# Altium PCB PCB1.PcbDoc (part 3 of 8)
Units mil, origin at the board's own origin, x right, y up, seen from the top; angles counter-clockwise.
Board outline 3820 x 2600 mil, 2 copper layers (Top Layer, Bottom Layer); 88 components, 130 nets, 566 pads, 113 vias.
Unrouted connection lines stored in the file: 16.
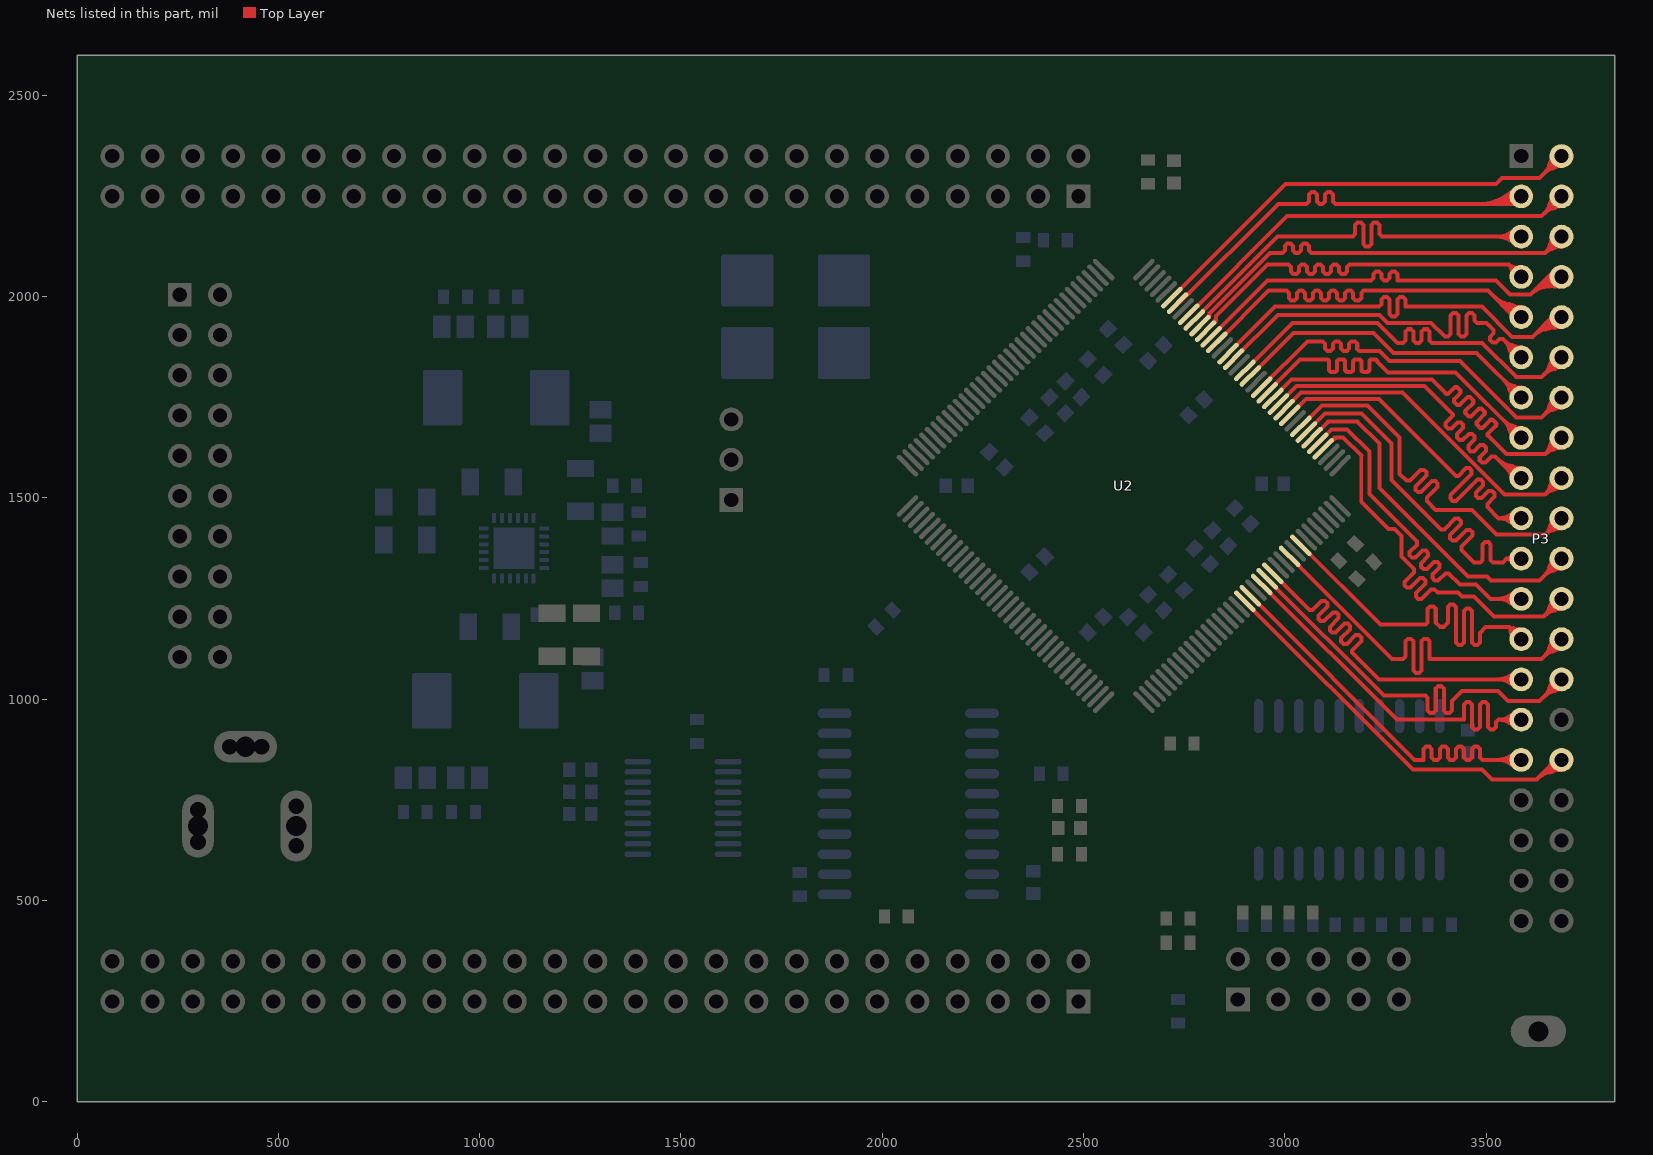
[diagram p3: the nets of this part, all layers, seen from the top]

## Via types
v1: diameter 30, hole 20, Top Layer to Bottom Layer, 74 vias
v2: diameter 20, hole 12, Top Layer to Bottom Layer, 36 vias
v3: diameter 17.72, hole 11.81, Top Layer to Bottom Layer, 3 vias

## Nets (pads, with @x,y where several pads share a name; then routed paths per layer and width w, separated by ;. In a path a pad name is that pad's centre, name@x,y a point inside that pad or via, vN(x,y) a via of type N, cw(c..) or ccw(c..) an arc to the next point about the centre after c; other vN are vias at no path point) (continued)
ADC1_D0: P3.3 U2.30 | length 2229.5
  Top Layer w10: U2.30@2733.63,1983.77 2737.56,1983.77 2983.78,2230 3054,2230 3060,2236 3060,2254.28 3066,2260.28 3074,2260.28 3080,2254.28 3080,2236 3086,2230 3094,2230 3100,2236 3100,2254.28 3106,2260.28 3114,2260.28 3120,2254.28 3120,2236 3126,2230 3568.19,2230 P3.3@3587.4,2249.21 ; U2.30@2754.51,2005.56 ccw(c2754.51,2017.24) 2762.76,2008.98 ; U2.30@2754.51,2005.56 ccw(c2754.51,2017.24) 2762.76,2008.98 ; U2.30@2754.51,2005.56 ccw(c2754.51,2017.24) 2762.76,2008.98 ; 3481.81,2230 ccw(c3481.81,2354.81) P3.3@3570.06,2266.56 ; 3481.81,2230 ccw(c3481.81,2354.81) P3.3@3570.06,2266.56 ; 3481.81,2230 ccw(c3481.81,2354.81) P3.3@3570.06,2266.56 ; 3505.95,2230 ccw(c3505.95,2330.67) P3.3@3577.13,2259.48 ; 3505.95,2230 ccw(c3505.95,2330.67) P3.3@3577.13,2259.48 ; 3505.95,2230 ccw(c3505.95,2330.67) P3.3@3577.13,2259.48 ; 3530.09,2230 ccw(c3530.09,2306.52) P3.3@3584.2,2252.41 ; 3530.09,2230 ccw(c3530.09,2306.52) P3.3@3584.2,2252.41 ; 3530.09,2230 ccw(c3530.09,2306.52) P3.3@3584.2,2252.41 ; 3539.02,2237.48 cw(c3551.19,2216.41) P3.3@3569.22,2232.74 ; 3539.02,2237.48 cw(c3551.19,2216.41) P3.3@3569.22,2232.74 ; 3539.02,2237.48 cw(c3551.19,2216.41) P3.3@3569.22,2232.74 ; 3549.75,2243.68 cw(c3560.58,2224.91) P3.3@3576.64,2239.46 ; 3549.75,2243.68 cw(c3560.58,2224.91) P3.3@3576.64,2239.46 ; 3549.75,2243.68 cw(c3560.58,2224.91) P3.3@3576.64,2239.46 ; 3552.08,2233.87 cw(c3559.71,2220.67) P3.3@3570.32,2231.61 ; 3552.08,2233.87 ccw(c3541.15,2252.8) P3.3@3562.95,2251.11 ; 3552.08,2233.87 cw(c3559.71,2220.67) P3.3@3570.32,2231.61 ; 3552.08,2233.87 ccw(c3541.15,2252.8) P3.3@3562.95,2251.11 ; 3552.08,2233.87 cw(c3559.71,2220.67) P3.3@3570.32,2231.61 ; 3552.08,2233.87 ccw(c3541.15,2252.8) P3.3@3562.95,2251.11 ; 3554.23,2230 ccw(c3554.23,2282.38) P3.3@3591.27,2245.34 ; 3554.23,2230 ccw(c3554.23,2282.38) P3.3@3591.27,2245.34 ; 3554.23,2230 ccw(c3554.23,2282.38) P3.3@3591.27,2245.34
ADC1_D1: P3.4 U2.28 | length 1747
  Top Layer w10: U2.28@2761.47,1955.93 3005.53,2200 3638.19,2200 P3.4@3687.4,2249.21 ; 3645.53,2207.34 cw(c3687.4,2165.47) P3.4@3687.4,2224.68 ; 3645.53,2207.34 ccw(c3603.66,2249.21) P3.4@3662.87,2249.21 ; 3645.53,2207.34 cw(c3687.4,2165.47) P3.4@3687.4,2224.68 ; 3645.53,2207.34 ccw(c3603.66,2249.21) P3.4@3662.87,2249.21 ; 3645.53,2207.34 ccw(c3603.66,2249.21) P3.4@3662.87,2249.21 ; 3645.53,2207.34 cw(c3687.4,2165.47) P3.4@3687.4,2224.68 ; 3656.89,2226.86 cw(c3694.02,2216.92) P3.4@3686.3,2254.57 ; 3656.89,2226.86 cw(c3694.02,2216.92) P3.4@3686.3,2254.57 ; 3656.89,2226.86 cw(c3694.02,2216.92) P3.4@3686.3,2254.57 ; 3662.6,2224.41 cw(c3687.4,2199.61) P3.4@3687.4,2234.68 ; 3662.6,2224.41 ccw(c3637.8,2249.21) P3.4@3672.87,2249.21 ; 3662.6,2224.41 cw(c3687.4,2199.61) P3.4@3687.4,2234.68 ; 3662.6,2224.41 ccw(c3637.8,2249.21) P3.4@3672.87,2249.21 ; 3662.6,2224.41 ccw(c3637.8,2249.21) P3.4@3672.87,2249.21 ; 3662.6,2224.41 cw(c3687.4,2199.61) P3.4@3687.4,2234.68 ; 3665.05,2218.7 ccw(c3655.11,2255.83) P3.4@3692.76,2248.11 ; 3665.05,2218.7 ccw(c3655.11,2255.83) P3.4@3692.76,2248.11 ; 3665.05,2218.7 ccw(c3655.11,2255.83) P3.4@3692.76,2248.11
ADC1_D2: P3.5 U2.27 | length 1501.1
  Top Layer w10: U2.27@2775.38,1942.01 2775.38,1943.27 2981.33,2149.21 3169,2149.21 3175,2155.21 3175,2177.68 3181,2183.68 3189,2183.68 3195,2177.68 3195,2131 3201,2125 3209,2125 3215,2131 3215,2177.68 3221,2183.68 3229,2183.68 3235,2177.68 3235,2155.21 3241,2149.21 P3.5@3587.4,2149.21 ; 3528.19,2149.21 cw(c3528.19,2090) P3.5@3570.06,2131.87 ; 3528.19,2149.21 ccw(c3528.19,2208.43) P3.5@3570.06,2166.56 ; 3528.19,2149.21 cw(c3528.19,2090) P3.5@3570.06,2131.87 ; 3528.19,2149.21 ccw(c3528.19,2208.43) P3.5@3570.06,2166.56 ; 3528.19,2149.21 ccw(c3528.19,2208.43) P3.5@3570.06,2166.56 ; 3528.19,2149.21 cw(c3528.19,2090) P3.5@3570.06,2131.87 ; 3552.33,2149.21 cw(c3552.33,2114.14) P3.5@3577.13,2138.94 ; 3552.33,2149.21 ccw(c3552.33,2184.28) P3.5@3577.13,2159.48 ; 3552.33,2149.21 cw(c3552.33,2114.14) P3.5@3577.13,2138.94 ; 3552.33,2149.21 ccw(c3552.33,2184.28) P3.5@3577.13,2159.48 ; 3552.33,2149.21 ccw(c3552.33,2184.28) P3.5@3577.13,2159.48 ; 3552.33,2149.21 cw(c3552.33,2114.14) P3.5@3577.13,2138.94
ADC1_D3: P3.6 U2.26 | length 1809.3
  Top Layer w10: U2.26@2789.3,1928.1 2813.17,1951.96 2813.17,1958.42 2963.43,2108.68 2994,2108.68 3000,2114.68 3000,2125.53 3006,2131.53 3014,2131.53 3020,2125.53 3020,2114.68 3026,2108.68 3034,2108.68 3040,2114.68 3040,2125.53 3046,2131.53 3054,2131.53 3060,2125.53 3060,2114.68 3066,2108.68 3646.87,2108.68 P3.6@3687.4,2149.21 ; U2.26@2809.54,1949.62 ccw(c2800.79,1958.37) 2813.17,1958.37 ; U2.26@2809.54,1949.62 ccw(c2800.79,1958.37) 2813.17,1958.37 ; U2.26@2809.54,1949.62 ccw(c2800.79,1958.37) 2813.17,1958.37 ; U2.26@2811.09,1948.98 cw(c2828.88,1948.98) 2816.3,1961.55 ; U2.26@2811.09,1948.98 cw(c2828.88,1948.98) 2816.3,1961.55 ; U2.26@2811.09,1948.98 cw(c2828.88,1948.98) 2816.3,1961.55 ; 3646.88,2108.69 cw(c3685.55,2070.01) P3.6@3686.83,2124.69 ; 3646.88,2108.69 ccw(c3608.2,2147.36) P3.6@3662.88,2148.64 ; 3646.88,2108.69 cw(c3685.55,2070.01) P3.6@3686.83,2124.69 ; 3646.88,2108.69 ccw(c3608.2,2147.36) P3.6@3662.88,2148.64 ; 3646.88,2108.69 ccw(c3608.2,2147.36) P3.6@3662.88,2148.64 ; 3646.88,2108.69 cw(c3685.55,2070.01) P3.6@3686.83,2124.69 ; 3657.2,2125.25 cw(c3696.05,2115.8) P3.6@3686.03,2154.51 ; 3657.2,2125.25 cw(c3696.05,2115.8) P3.6@3686.03,2154.51 ; 3657.2,2125.25 cw(c3696.05,2115.8) P3.6@3686.03,2154.51 ; 3663.4,2125.21 cw(c3686.31,2102.3) P3.6@3687.06,2134.69 ; 3663.4,2125.21 ccw(c3640.49,2148.12) P3.6@3672.88,2148.87 ; 3663.4,2125.21 cw(c3686.31,2102.3) P3.6@3687.06,2134.69 ; 3663.4,2125.21 ccw(c3640.49,2148.12) P3.6@3672.88,2148.87 ; 3663.4,2125.21 ccw(c3640.49,2148.12) P3.6@3672.88,2148.87 ; 3663.4,2125.21 cw(c3686.31,2102.3) P3.6@3687.06,2134.69 ; 3663.44,2119.01 ccw(c3653.99,2157.86) P3.6@3692.7,2147.84 ; 3663.44,2119.01 ccw(c3653.99,2157.86) P3.6@3692.7,2147.84 ; 3663.44,2119.01 ccw(c3653.99,2157.86) P3.6@3692.7,2147.84
ADC1_D4: P3.7 U2.25 | length 1421.7
  Top Layer w10: U2.25@2803.22,1914.18 2829.17,1940.12 2829.17,1951.8 2957.37,2080 3009,2080 3015,2074 3015,2062 3021,2056 3029,2056 3035,2062 3035,2074 3041,2080 3049,2080 3055,2074 3055,2062 3061,2056 3069,2056 3075,2062 3075,2074 3081,2080 3089,2080 3095,2074 3095,2062 3101,2056 3109,2056 3115,2062 3115,2074 3121,2080 3129,2080 3135,2074 3135,2062 3141,2056 3149,2056 3155,2062 3155,2074 3161,2080 3556.61,2080 ; P3.7@3587.4,2049.21 3556.61,2080 ; U2.25@2823.46,1935.7 ccw(c2809.69,1949.47) 2829.17,1949.47 ; U2.25@2823.46,1935.7 ccw(c2809.69,1949.47) 2829.17,1949.47 ; U2.25@2823.46,1935.7 ccw(c2809.69,1949.47) 2829.17,1949.47 ; 3556.62,2080 cw(c3537.96,2061.35) P3.7@3563.58,2055.06 ; 3556.62,2080 ccw(c3575.27,2098.65) P3.7@3581.56,2073.03 ; 3556.62,2080 cw(c3537.96,2061.35) P3.7@3563.58,2055.06 ; 3556.62,2080 ccw(c3575.27,2098.65) P3.7@3581.56,2073.03 ; 3556.62,2080 ccw(c3575.27,2098.65) P3.7@3581.56,2073.03 ; 3556.62,2080 cw(c3537.96,2061.35) P3.7@3563.58,2055.06 ; 3563.3,2068.55 ccw(c3606.82,2069.47) P3.7@3576.7,2038.04 ; 3563.3,2068.55 ccw(c3606.82,2069.47) P3.7@3576.7,2038.04 ; 3563.3,2068.55 ccw(c3606.82,2069.47) P3.7@3576.7,2038.04 ; 3568.06,2073.32 cw(c3567.14,2029.79) P3.7@3598.57,2059.92 ; 3568.06,2073.32 cw(c3567.14,2029.79) P3.7@3598.57,2059.92 ; 3568.06,2073.32 cw(c3567.14,2029.79) P3.7@3598.57,2059.92
ADC1_D5: P3.8 U2.24 | length 2086.9
  Top Layer w10: U2.24@2817.14,1900.26 2956.89,2040 3214,2040 3220,2046 3220,2056.75 3226,2062.75 3234,2062.75 3240,2056.75 3240,2046 3246,2040 3254,2040 3260,2046 3260,2056.75 3266,2062.75 3274,2062.75 3280,2056.75 3280,2040 3525,2040 3560,2005 3610,2005 ; P3.8@3664.43,2040.62 cw(c3652.77,2036.26) 3659.31,2025.67 cw(c3669.42,2009.27) P3.8@3677.34,2026.85 ; P3.8@3687.4,2049.21 3675,2049.21 3675,2070 3610,2005 ; 3610,2005 cw(c3664.1,1950.91) P3.8@3681.74,2025.35 ; 3610,2005 cw(c3664.1,1950.91) P3.8@3681.74,2025.35 ; 3610,2005 cw(c3664.1,1950.91) P3.8@3681.74,2025.35 ; 3622.67,2017.67 cw(c3668.95,1971.39) P3.8@3684.05,2035.08 ; 3622.67,2017.67 cw(c3668.95,1971.39) P3.8@3684.05,2035.08 ; 3622.67,2017.67 cw(c3668.95,1971.39) P3.8@3684.05,2035.08 ; 3635.34,2030.34 cw(c3673.81,1991.87) P3.8@3686.36,2044.81 ; 3635.34,2030.34 cw(c3673.81,1991.87) P3.8@3686.36,2044.81 ; 3635.34,2030.34 cw(c3673.81,1991.87) P3.8@3686.36,2044.81 ; 3644.12,2024.25 ccw(c3642.16,2091.9) P3.8@3691.38,2045.46 ; 3644.12,2024.25 ccw(c3642.16,2091.9) P3.8@3691.38,2045.46 ; 3644.12,2024.25 ccw(c3642.16,2091.9) P3.8@3691.38,2045.46 ; 3648.01,2043.01 cw(c3678.66,2012.35) P3.8@3688.66,2054.54 ; 3648.01,2043.01 cw(c3678.66,2012.35) P3.8@3688.66,2054.54 ; 3648.01,2043.01 cw(c3678.66,2012.35) P3.8@3688.66,2054.54 ; 3668.25,2024.95 ccw(c3666.99,2068.47) P3.8@3698.66,2038.59 ; 3668.25,2024.95 ccw(c3666.99,2068.47) P3.8@3698.66,2038.59 ; 3668.25,2024.95 ccw(c3666.99,2068.47) P3.8@3698.66,2038.59
ADC1_D6: P3.9 U2.23 | length 2067.5
  Top Layer w10: U2.23@2831.06,1886.34 2959.72,2015 3004,2015 3010,2009 3010,1997 3016,1991 3024,1991 3030,1997 3030,2009 3036,2015 3044,2015 3050,2009 3050,1997 3056,1991 3064,1991 3070,1997 3070,2009 3076,2015 3084,2015 3090,2009 3090,1997 3096,1991 3104,1991 3110,1997 3110,2009 3116,2015 3124,2015 3130,2009 3130,1997 3136,1991 3144,1991 3150,1997 3150,2009 3156,2015 3164,2015 3170,2009 3170,1997 3176,1991 3184,1991 3190,1997 3190,2009 3196,2015 3505,2015 3570,1950 3580.3,1950 3587.4,1957.1 P3.9@3587.4,1949.21 ; P3.9@3564.08,1956.81 ccw(c3543.97,1963.37) 3560.65,1976.39 ccw(c3572.28,1985.47) P3.9@3577.96,1971.85 ; 3517.17,2002.83 ccw(c3587.4,2073.06) P3.9@3587.4,1973.74 ; 3517.17,2002.83 ccw(c3587.4,2073.06) P3.9@3587.4,1973.74 ; 3517.17,2002.83 ccw(c3587.4,2073.06) P3.9@3587.4,1973.74 ; 3534.24,1985.76 ccw(c3587.4,2038.92) P3.9@3587.4,1963.74 ; 3534.24,1985.76 ccw(c3587.4,2038.92) P3.9@3587.4,1963.74 ; 3534.24,1985.76 ccw(c3587.4,2038.92) P3.9@3587.4,1963.74 ; 3537.69,1987.06 cw(c3519.88,1920.59) P3.9@3583.23,1947.45 ; 3537.69,1987.06 cw(c3519.88,1920.59) P3.9@3583.23,1947.45 ; 3537.69,1987.06 cw(c3519.88,1920.59) P3.9@3583.23,1947.45 ; 3551.31,1968.69 ccw(c3587.4,2004.78) P3.9@3587.4,1953.74 ; 3551.31,1968.69 ccw(c3587.4,2004.78) P3.9@3587.4,1953.74 ; 3551.31,1968.69 ccw(c3587.4,2004.78) P3.9@3587.4,1953.74 ; 3557.28,1962.72 cw(c3543.77,1949.21) P3.9@3562.87,1949.21 ; 3557.28,1962.72 cw(c3543.77,1949.21) P3.9@3562.87,1949.21 ; 3557.28,1962.72 cw(c3543.77,1949.21) P3.9@3562.87,1949.21 ; 3557.48,1981.76 cw(c3543.81,1930.74) P3.9@3592.44,1951.35 ; 3557.48,1981.76 cw(c3543.81,1930.74) P3.9@3592.44,1951.35 ; 3557.48,1981.76 cw(c3543.81,1930.74) P3.9@3592.44,1951.35 ; 3559.89,1971.11 cw(c3551.42,1939.47) P3.9@3583.03,1948.03 ; 3559.89,1971.11 cw(c3551.42,1939.47) P3.9@3583.03,1948.03 ; 3559.89,1971.11 cw(c3551.42,1939.47) P3.9@3583.03,1948.03
ADC1_D7: P3.10 U2.21 | length 2018.2
  Top Layer w10: U2.21@2858.9,1858.5 2975.4,1975 3234,1975 3240,1981 3240,1993 3246,1999 3254,1999 3260,1993 3260,1957 3266,1951 3274,1951 3280,1957 3280,1993 3286,1999 3294,1999 3300,1993 3300,1975 3490,1975 3565,1900 3615,1900 ; P3.10@3666.25,1936.8 cw(c3657.11,1931.44) 3663.79,1923.21 cw(c3674.14,1910.47) P3.10@3679.46,1926.01 ; P3.10@3687.4,1949.21 3664.21,1949.21 3615,1900 ; 3615,1900 cw(c3676.01,1839) P3.10@3684.88,1924.81 ; 3615,1900 cw(c3676.01,1839) P3.10@3684.88,1924.81 ; 3615,1900 cw(c3676.01,1839) P3.10@3684.88,1924.81 ; 3629.86,1914.86 cw(c3678.79,1865.93) P3.10@3685.91,1934.76 ; 3629.86,1914.86 cw(c3678.79,1865.93) P3.10@3685.91,1934.76 ; 3629.86,1914.86 cw(c3678.79,1865.93) P3.10@3685.91,1934.76 ; 3644.72,1929.72 cw(c3681.58,1892.86) P3.10@3686.94,1944.71 ; 3644.72,1929.72 cw(c3681.58,1892.86) P3.10@3686.94,1944.71 ; 3644.72,1929.72 cw(c3681.58,1892.86) P3.10@3686.94,1944.71 ; 3647.72,1918.86 ccw(c3637.02,1985.69) P3.10@3691.83,1946 ; 3647.72,1918.86 ccw(c3637.02,1985.69) P3.10@3691.83,1946 ; 3647.72,1918.86 ccw(c3637.02,1985.69) P3.10@3691.83,1946 ; 3650.52,1929.09 ccw(c3643.09,1975.5) P3.10@3683.51,1951.52 ; 3650.52,1929.09 ccw(c3643.09,1975.5) P3.10@3683.51,1951.52 ; 3650.52,1929.09 ccw(c3643.09,1975.5) P3.10@3683.51,1951.52 ; 3671.55,1922.68 ccw(c3664.67,1965.67) P3.10@3699.94,1940.14 ; 3671.55,1922.68 ccw(c3664.67,1965.67) P3.10@3699.94,1940.14 ; 3671.55,1922.68 ccw(c3664.67,1965.67) P3.10@3699.94,1940.14
ADC1_D8: P3.11 U2.20 | length 1722.7
  Top Layer w10: U2.20@2872.82,1844.58 2983.24,1955 3235,1955 3255,1935 3363.61,1935 3397.61,1901 3405.61,1901 3411.61,1907 3411.61,1953 3417.61,1959 3425.61,1959 3431.61,1953 3431.61,1907 3437.61,1901 3445.61,1901 3451.61,1907 3451.61,1953 3457.61,1959 3465.61,1959 3471.61,1953 3471.61,1941 3477.61,1935 3501.61,1935 3519.05,1917.56 3519.05,1909.08 3510.19,1900.22 3510.19,1891.73 3515.85,1886.08 3524.34,1886.08 3533.19,1894.93 3541.68,1894.93 P3.11@3587.4,1849.21 ; 3545.53,1891.08 cw(c3503.66,1849.21) P3.11@3562.87,1849.21 ; 3545.53,1891.08 ccw(c3587.4,1932.95) P3.11@3587.4,1873.74 ; 3545.53,1891.08 cw(c3503.66,1849.21) P3.11@3562.87,1849.21 ; 3545.53,1891.08 ccw(c3587.4,1932.95) P3.11@3587.4,1873.74 ; 3545.53,1891.08 ccw(c3587.4,1932.95) P3.11@3587.4,1873.74 ; 3545.53,1891.08 cw(c3503.66,1849.21) P3.11@3562.87,1849.21 ; 3556.89,1871.56 ccw(c3594.02,1881.51) P3.11@3586.3,1843.85 ; 3556.89,1871.56 ccw(c3594.02,1881.51) P3.11@3586.3,1843.85 ; 3556.89,1871.56 ccw(c3594.02,1881.51) P3.11@3586.3,1843.85 ; 3562.6,1874.01 cw(c3537.8,1849.21) P3.11@3572.87,1849.21 ; 3562.6,1874.01 ccw(c3587.4,1898.81) P3.11@3587.4,1863.74 ; 3562.6,1874.01 cw(c3537.8,1849.21) P3.11@3572.87,1849.21 ; 3562.6,1874.01 ccw(c3587.4,1898.81) P3.11@3587.4,1863.74 ; 3562.6,1874.01 ccw(c3587.4,1898.81) P3.11@3587.4,1863.74 ; 3562.6,1874.01 cw(c3537.8,1849.21) P3.11@3572.87,1849.21 ; 3565.05,1879.73 cw(c3555.11,1842.6) P3.11@3592.76,1850.31 ; 3565.05,1879.73 cw(c3555.11,1842.6) P3.11@3592.76,1850.31 ; 3565.05,1879.73 cw(c3555.11,1842.6) P3.11@3592.76,1850.31
ADC1_D9: P3.12 U2.18 | length 1719.5
  Top Layer w10: U2.18@2900.66,1816.74 3018.92,1935 3230,1935 3280,1885 3294,1885 3300,1891 3300,1913 3306,1919 3314,1919 3320,1913 3320,1891 3326,1885 3334,1885 3340,1891 3340,1913 3346,1919 3354,1919 3360,1913 3360,1891 3366,1885 3490,1885 3575,1800 3638.19,1800 P3.12@3687.4,1849.21 ; 3645.53,1807.34 cw(c3687.4,1765.47) P3.12@3687.4,1824.68 ; 3645.53,1807.34 ccw(c3603.66,1849.21) P3.12@3662.87,1849.21 ; 3645.53,1807.34 cw(c3687.4,1765.47) P3.12@3687.4,1824.68 ; 3645.53,1807.34 ccw(c3603.66,1849.21) P3.12@3662.87,1849.21 ; 3645.53,1807.34 ccw(c3603.66,1849.21) P3.12@3662.87,1849.21 ; 3645.53,1807.34 cw(c3687.4,1765.47) P3.12@3687.4,1824.68 ; 3656.89,1826.86 cw(c3694.02,1816.92) P3.12@3686.3,1854.57 ; 3656.89,1826.86 cw(c3694.02,1816.92) P3.12@3686.3,1854.57 ; 3656.89,1826.86 cw(c3694.02,1816.92) P3.12@3686.3,1854.57 ; 3662.6,1824.41 cw(c3687.4,1799.61) P3.12@3687.4,1834.68 ; 3662.6,1824.41 ccw(c3637.8,1849.21) P3.12@3672.87,1849.21 ; 3662.6,1824.41 cw(c3687.4,1799.61) P3.12@3687.4,1834.68 ; 3662.6,1824.41 ccw(c3637.8,1849.21) P3.12@3672.87,1849.21 ; 3662.6,1824.41 ccw(c3637.8,1849.21) P3.12@3672.87,1849.21 ; 3662.6,1824.41 cw(c3687.4,1799.61) P3.12@3687.4,1834.68 ; 3665.05,1818.7 ccw(c3655.11,1855.83) P3.12@3692.76,1848.11 ; 3665.05,1818.7 ccw(c3655.11,1855.83) P3.12@3692.76,1848.11 ; 3665.05,1818.7 ccw(c3655.11,1855.83) P3.12@3692.76,1848.11
ADC1_D10: P3.13 U2.17 | length 1483.4
  Top Layer w10: U2.17@2914.58,1802.82 3021.76,1910 3220,1910 3270,1860 3476.61,1860 P3.13@3587.4,1749.21 ; 3545.53,1791.08 cw(c3503.66,1749.21) P3.13@3562.87,1749.21 ; 3545.53,1791.08 ccw(c3587.4,1832.95) P3.13@3587.4,1773.74 ; 3545.53,1791.08 cw(c3503.66,1749.21) P3.13@3562.87,1749.21 ; 3545.53,1791.08 ccw(c3587.4,1832.95) P3.13@3587.4,1773.74 ; 3545.53,1791.08 ccw(c3587.4,1832.95) P3.13@3587.4,1773.74 ; 3545.53,1791.08 cw(c3503.66,1749.21) P3.13@3562.87,1749.21 ; 3556.89,1771.56 ccw(c3594.02,1781.51) P3.13@3586.3,1743.85 ; 3556.89,1771.56 ccw(c3594.02,1781.51) P3.13@3586.3,1743.85 ; 3556.89,1771.56 ccw(c3594.02,1781.51) P3.13@3586.3,1743.85 ; 3562.6,1774.01 cw(c3537.8,1749.21) P3.13@3572.87,1749.21 ; 3562.6,1774.01 ccw(c3587.4,1798.81) P3.13@3587.4,1763.74 ; 3562.6,1774.01 cw(c3537.8,1749.21) P3.13@3572.87,1749.21 ; 3562.6,1774.01 ccw(c3587.4,1798.81) P3.13@3587.4,1763.74 ; 3562.6,1774.01 ccw(c3587.4,1798.81) P3.13@3587.4,1763.74 ; 3562.6,1774.01 cw(c3537.8,1749.21) P3.13@3572.87,1749.21 ; 3565.05,1779.73 cw(c3555.11,1742.6) P3.13@3592.76,1750.31 ; 3565.05,1779.73 cw(c3555.11,1742.6) P3.13@3592.76,1750.31 ; 3565.05,1779.73 cw(c3555.11,1742.6) P3.13@3592.76,1750.31
ADC1_D11: P3.14 U2.15 | length 1666
  Top Layer w10: U2.15@2942.42,1774.98 3056.44,1889 3094,1889 3100,1883 3100,1871 3106,1865 3114,1865 3120,1871 3120,1883 3126,1889 3134,1889 3140,1883 3140,1871 3146,1865 3154,1865 3160,1871 3160,1883 3166,1889 3174,1889 3180,1883 3180,1870 3185,1865 3235,1865 3260,1840 3435,1840 3575,1700 3638.19,1700 P3.14@3687.4,1749.21 ; 3645.53,1707.34 cw(c3687.4,1665.47) P3.14@3687.4,1724.68 ; 3645.53,1707.34 ccw(c3603.66,1749.21) P3.14@3662.87,1749.21 ; 3645.53,1707.34 cw(c3687.4,1665.47) P3.14@3687.4,1724.68 ; 3645.53,1707.34 ccw(c3603.66,1749.21) P3.14@3662.87,1749.21 ; 3645.53,1707.34 ccw(c3603.66,1749.21) P3.14@3662.87,1749.21 ; 3645.53,1707.34 cw(c3687.4,1665.47) P3.14@3687.4,1724.68 ; 3656.89,1726.86 cw(c3694.02,1716.92) P3.14@3686.3,1754.57 ; 3656.89,1726.86 cw(c3694.02,1716.92) P3.14@3686.3,1754.57 ; 3656.89,1726.86 cw(c3694.02,1716.92) P3.14@3686.3,1754.57 ; 3662.6,1724.41 cw(c3687.4,1699.61) P3.14@3687.4,1734.68 ; 3662.6,1724.41 ccw(c3637.8,1749.21) P3.14@3672.87,1749.21 ; 3662.6,1724.41 cw(c3687.4,1699.61) P3.14@3687.4,1734.68 ; 3662.6,1724.41 ccw(c3637.8,1749.21) P3.14@3672.87,1749.21 ; 3662.6,1724.41 ccw(c3637.8,1749.21) P3.14@3672.87,1749.21 ; 3662.6,1724.41 cw(c3687.4,1699.61) P3.14@3687.4,1734.68 ; 3665.05,1718.7 ccw(c3655.11,1755.83) P3.14@3692.76,1748.11 ; 3665.05,1718.7 ccw(c3655.11,1755.83) P3.14@3692.76,1748.11 ; 3665.05,1718.7 ccw(c3655.11,1755.83) P3.14@3692.76,1748.11
ADC1_D12: P3.15 U2.14 | length 1600.9
  Top Layer w10: U2.14@2956.34,1761.06 2956.34,1762.13 3038.21,1844 3104,1844 cw(c3104,1838) 3110,1838 3110,1819.25 ccw(c3116,1819.25) 3116,1813.25 3124,1813.25 ccw(c3124,1819.25) 3130,1819.25 3130,1838 cw(c3136,1838) 3136,1844 3144,1844 cw(c3144,1838) 3150,1838 3150,1819.25 ccw(c3156,1819.25) 3156,1813.25 3164,1813.25 ccw(c3164,1819.25) 3170,1819.25 3170,1838 cw(c3176,1838) 3176,1844 3184,1844 cw(c3184,1838) 3190,1838 3190,1819.25 ccw(c3196,1819.25) 3196,1813.25 3204,1813.25 ccw(c3204,1819.25) 3210,1819.25 3210,1838 cw(c3216,1838) 3216,1844 3224,1844 cw(c3224,1838) 3230,1838 3255.97,1812.03 3424.58,1812.03 P3.15@3587.4,1649.21 ; 3545.53,1691.08 cw(c3503.66,1649.21) P3.15@3562.87,1649.21 ; 3545.53,1691.08 ccw(c3587.4,1732.95) P3.15@3587.4,1673.74 ; 3545.53,1691.08 cw(c3503.66,1649.21) P3.15@3562.87,1649.21 ; 3545.53,1691.08 ccw(c3587.4,1732.95) P3.15@3587.4,1673.74 ; 3545.53,1691.08 ccw(c3587.4,1732.95) P3.15@3587.4,1673.74 ; 3545.53,1691.08 cw(c3503.66,1649.21) P3.15@3562.87,1649.21 ; 3556.89,1671.56 ccw(c3594.02,1681.51) P3.15@3586.3,1643.85 ; 3556.89,1671.56 ccw(c3594.02,1681.51) P3.15@3586.3,1643.85 ; 3556.89,1671.56 ccw(c3594.02,1681.51) P3.15@3586.3,1643.85 ; 3562.6,1674.01 cw(c3537.8,1649.21) P3.15@3572.87,1649.21 ; 3562.6,1674.01 ccw(c3587.4,1698.81) P3.15@3587.4,1663.74 ; 3562.6,1674.01 cw(c3537.8,1649.21) P3.15@3572.87,1649.21 ; 3562.6,1674.01 ccw(c3587.4,1698.81) P3.15@3587.4,1663.74 ; 3562.6,1674.01 ccw(c3587.4,1698.81) P3.15@3587.4,1663.74 ; 3562.6,1674.01 cw(c3537.8,1649.21) P3.15@3572.87,1649.21 ; 3565.05,1679.73 cw(c3555.11,1642.6) P3.15@3592.76,1650.31 ; 3565.05,1679.73 cw(c3555.11,1642.6) P3.15@3592.76,1650.31 ; 3565.05,1679.73 cw(c3555.11,1642.6) P3.15@3592.76,1650.31
ADC1_D13: P3.16 U2.13 | length 1752.1
  Top Layer w10: U2.13@2970.26,1747.14 3017.11,1794 3365.24,1794 3398.96,1760.28 ccw(c3403.2,1764.52) 3407.45,1760.28 3421.01,1773.84 cw(c3425.25,1769.6) 3429.49,1773.84 3435.15,1768.19 cw(c3430.91,1763.94) 3435.15,1759.7 3421.59,1746.14 ccw(c3425.83,1741.9) 3421.59,1737.65 3427.25,1732 ccw(c3431.49,1736.24) 3435.73,1732 3452.97,1749.23 cw(c3457.21,1744.99) 3461.45,1749.23 3467.11,1743.58 cw(c3462.87,1739.33) 3467.11,1735.09 3449.87,1717.85 ccw(c3454.12,1713.61) 3449.87,1709.37 3455.53,1703.71 ccw(c3459.77,1707.95) 3464.02,1703.71 3481.25,1720.95 cw(c3485.49,1716.71) 3489.74,1720.95 3495.39,1715.29 cw(c3491.15,1711.05) 3495.39,1706.81 3478.16,1689.57 ccw(c3482.4,1685.33) 3478.16,1681.08 3483.81,1675.43 ccw(c3488.06,1679.67) 3492.3,1675.43 3509.54,1692.66 cw(c3513.78,1688.42) 3518.02,1692.66 3523.68,1687.01 cw(c3519.44,1682.76) 3523.68,1678.52 3504.62,1659.46 ccw(c3507.04,1657.04) 3504.62,1654.62 3550.56,1608.68 3646.87,1608.68 P3.16@3687.4,1649.21 ; 3646.88,1608.69 cw(c3685.55,1570.01) P3.16@3686.83,1624.69 ; 3646.88,1608.69 ccw(c3608.2,1647.36) P3.16@3662.88,1648.64 ; 3646.88,1608.69 cw(c3685.55,1570.01) P3.16@3686.83,1624.69 ; 3646.88,1608.69 ccw(c3608.2,1647.36) P3.16@3662.88,1648.64 ; 3646.88,1608.69 ccw(c3608.2,1647.36) P3.16@3662.88,1648.64 ; 3646.88,1608.69 cw(c3685.55,1570.01) P3.16@3686.83,1624.69 ; 3657.2,1625.25 cw(c3696.05,1615.8) P3.16@3686.03,1654.51 ; 3657.2,1625.25 cw(c3696.05,1615.8) P3.16@3686.03,1654.51 ; 3657.2,1625.25 cw(c3696.05,1615.8) P3.16@3686.03,1654.51 ; 3663.4,1625.21 cw(c3686.31,1602.3) P3.16@3687.06,1634.69 ; 3663.4,1625.21 ccw(c3640.49,1648.12) P3.16@3672.88,1648.87 ; 3663.4,1625.21 cw(c3686.31,1602.3) P3.16@3687.06,1634.69 ; 3663.4,1625.21 ccw(c3640.49,1648.12) P3.16@3672.88,1648.87 ; 3663.4,1625.21 ccw(c3640.49,1648.12) P3.16@3672.88,1648.87 ; 3663.4,1625.21 cw(c3686.31,1602.3) P3.16@3687.06,1634.69 ; 3663.44,1619.01 ccw(c3653.99,1657.86) P3.16@3692.7,1647.84 ; 3663.44,1619.01 ccw(c3653.99,1657.86) P3.16@3692.7,1647.84 ; 3663.44,1619.01 ccw(c3653.99,1657.86) P3.16@3692.7,1647.84
ADC1_D14: P3.17 U2.12 | length 2010
  Top Layer w10: U2.12@2984.18,1733.22 3028.95,1778 3347,1778 3417.5,1707.5 3417.5,1704.63 3399.49,1686.62 3399.49,1678.14 3405.15,1672.48 3413.63,1672.48 3428.83,1687.68 3437.32,1687.68 3442.98,1682.02 3442.98,1673.54 3427.77,1658.34 3427.77,1649.85 3433.43,1644.19 3441.92,1644.19 3457.12,1659.4 3465.6,1659.4 3471.26,1653.74 3471.26,1645.25 3456.06,1630.05 3456.06,1621.57 3461.71,1615.91 3470.2,1615.91 3485.4,1631.11 3493.89,1631.11 3499.54,1625.46 3499.54,1616.97 3484.34,1601.77 3484.34,1593.28 3490,1587.63 3498.48,1587.63 3513.69,1602.83 3522.17,1602.83 3575.79,1549.21 P3.17@3587.4,1549.21 ; P3.17@3565.25,1559.75 ccw(c3551.43,1566.32) 3563.97,1575.09 ccw(c3572.72,1581.21) P3.17@3577.17,1571.51 ; 3525.7,1599.3 ccw(c3587.4,1660.99) P3.17@3587.4,1573.74 ; 3525.7,1599.3 ccw(c3587.4,1660.99) P3.17@3587.4,1573.74 ; 3525.7,1599.3 ccw(c3587.4,1660.99) P3.17@3587.4,1573.74 ; 3541.22,1586.11 cw(c3525.29,1526.66) P3.17@3583.15,1547.67 ; 3541.22,1586.11 cw(c3525.29,1526.66) P3.17@3583.15,1547.67 ; 3541.22,1586.11 cw(c3525.29,1526.66) P3.17@3583.15,1547.67 ; 3542.78,1582.22 ccw(c3587.4,1626.85) P3.17@3587.4,1563.74 ; 3542.78,1582.22 ccw(c3587.4,1626.85) P3.17@3587.4,1563.74 ; 3542.78,1582.22 ccw(c3587.4,1626.85) P3.17@3587.4,1563.74 ; 3553.74,1571.26 cw(c3531.7,1549.21) P3.17@3562.87,1549.21 ; 3553.74,1571.26 cw(c3531.7,1549.21) P3.17@3562.87,1549.21 ; 3553.74,1571.26 cw(c3531.7,1549.21) P3.17@3562.87,1549.21 ; 3558.31,1566.26 ccw(c3587.66,1574.13) P3.17@3587.35,1543.74 ; 3558.31,1566.26 ccw(c3587.66,1574.13) P3.17@3587.35,1543.74 ; 3558.31,1566.26 ccw(c3587.66,1574.13) P3.17@3587.35,1543.74 ; 3559.76,1581.15 cw(c3547.3,1534.65) P3.17@3592.55,1551.08 ; 3559.76,1581.15 cw(c3547.3,1534.65) P3.17@3592.55,1551.08 ; 3559.76,1581.15 cw(c3547.3,1534.65) P3.17@3592.55,1551.08 ; 3559.85,1565.15 ccw(c3587.4,1592.71) P3.17@3587.4,1553.74 ; 3559.85,1565.15 ccw(c3587.4,1592.71) P3.17@3587.4,1553.74 ; 3559.85,1565.15 ccw(c3587.4,1592.71) P3.17@3587.4,1553.74 ; 3562.8,1570.33 cw(c3555.61,1543.51) P3.17@3582.95,1548.41 ; 3562.8,1570.33 cw(c3555.61,1543.51) P3.17@3582.95,1548.41 ; 3562.8,1570.33 cw(c3555.61,1543.51) P3.17@3582.95,1548.41
ADC1_D15: P3.18 U2.11 | length 1510.2
  Top Layer w10: U2.11@2998.1,1719.3 3040.79,1762 3293,1762 3546.32,1508.68 3646.87,1508.68 P3.18@3687.4,1549.21 ; 3646.88,1508.69 cw(c3685.55,1470.01) P3.18@3686.83,1524.69 ; 3646.88,1508.69 ccw(c3608.2,1547.36) P3.18@3662.88,1548.64 ; 3646.88,1508.69 cw(c3685.55,1470.01) P3.18@3686.83,1524.69 ; 3646.88,1508.69 ccw(c3608.2,1547.36) P3.18@3662.88,1548.64 ; 3646.88,1508.69 ccw(c3608.2,1547.36) P3.18@3662.88,1548.64 ; 3646.88,1508.69 cw(c3685.55,1470.01) P3.18@3686.83,1524.69 ; 3657.2,1525.25 cw(c3696.05,1515.8) P3.18@3686.03,1554.51 ; 3657.2,1525.25 cw(c3696.05,1515.8) P3.18@3686.03,1554.51 ; 3657.2,1525.25 cw(c3696.05,1515.8) P3.18@3686.03,1554.51 ; 3663.4,1525.21 cw(c3686.31,1502.3) P3.18@3687.06,1534.69 ; 3663.4,1525.21 ccw(c3640.49,1548.12) P3.18@3672.88,1548.87 ; 3663.4,1525.21 cw(c3686.31,1502.3) P3.18@3687.06,1534.69 ; 3663.4,1525.21 ccw(c3640.49,1548.12) P3.18@3672.88,1548.87 ; 3663.4,1525.21 ccw(c3640.49,1548.12) P3.18@3672.88,1548.87 ; 3663.4,1525.21 cw(c3686.31,1502.3) P3.18@3687.06,1534.69 ; 3663.44,1519.01 ccw(c3653.99,1557.86) P3.18@3692.7,1547.84 ; 3663.44,1519.01 ccw(c3653.99,1557.86) P3.18@3692.7,1547.84 ; 3663.44,1519.01 ccw(c3653.99,1557.86) P3.18@3692.7,1547.84
ADC1_OF: P3.2 U2.31 | length 1812.9
  Top Layer w10: U2.31@2719.71,1997.69 3002.02,2280 3525,2280 3540,2295 3633.19,2295 P3.2@3687.4,2349.21 ; 3645.53,2307.34 cw(c3687.4,2265.47) P3.2@3687.4,2324.68 ; 3645.53,2307.34 ccw(c3603.66,2349.21) P3.2@3662.87,2349.21 ; 3645.53,2307.34 cw(c3687.4,2265.47) P3.2@3687.4,2324.68 ; 3645.53,2307.34 ccw(c3603.66,2349.21) P3.2@3662.87,2349.21 ; 3645.53,2307.34 ccw(c3603.66,2349.21) P3.2@3662.87,2349.21 ; 3645.53,2307.34 cw(c3687.4,2265.47) P3.2@3687.4,2324.68 ; 3656.89,2326.86 cw(c3694.02,2316.92) P3.2@3686.3,2354.57 ; 3656.89,2326.86 cw(c3694.02,2316.92) P3.2@3686.3,2354.57 ; 3656.89,2326.86 cw(c3694.02,2316.92) P3.2@3686.3,2354.57 ; 3662.6,2324.41 cw(c3687.4,2299.61) P3.2@3687.4,2334.68 ; 3662.6,2324.41 ccw(c3637.8,2349.21) P3.2@3672.87,2349.21 ; 3662.6,2324.41 cw(c3687.4,2299.61) P3.2@3687.4,2334.68 ; 3662.6,2324.41 ccw(c3637.8,2349.21) P3.2@3672.87,2349.21 ; 3662.6,2324.41 ccw(c3637.8,2349.21) P3.2@3672.87,2349.21 ; 3662.6,2324.41 cw(c3687.4,2299.61) P3.2@3687.4,2334.68 ; 3665.05,2318.7 ccw(c3655.11,2355.83) P3.2@3692.76,2348.11 ; 3665.05,2318.7 ccw(c3655.11,2355.83) P3.2@3692.76,2348.11 ; 3665.05,2318.7 ccw(c3655.11,2355.83) P3.2@3692.76,2348.11
ADC2_CLK_N: P3.31 U2.128 | length 1501.1
  Top Layer w10: U2.128@2914.58,1257.18 3322.55,849.21 3345,849.21 3345,876.67 3351,882.67 3359,882.67 3365,876.67 3365,855.21 3371,849.21 3379,849.21 3385,855.21 3385,876.67 3391,882.67 3399,882.67 3405,876.67 3405,855.21 3411,849.21 3419,849.21 3425,855.21 3425,876.67 3431,882.67 3439,882.67 3445,876.67 3445,855.21 3451,849.21 3459,849.21 3465,855.21 3465,876.67 3471,882.67 3479,882.67 3485,876.67 3485,855.21 3491,849.21 P3.31@3587.4,849.21 ; 3528.19,849.21 cw(c3528.19,790) P3.31@3570.06,831.87 ; 3528.19,849.21 ccw(c3528.19,908.43) P3.31@3570.06,866.56 ; 3528.19,849.21 cw(c3528.19,790) P3.31@3570.06,831.87 ; 3528.19,849.21 ccw(c3528.19,908.43) P3.31@3570.06,866.56 ; 3528.19,849.21 ccw(c3528.19,908.43) P3.31@3570.06,866.56 ; 3528.19,849.21 cw(c3528.19,790) P3.31@3570.06,831.87 ; 3552.33,849.21 cw(c3552.33,814.14) P3.31@3577.13,838.94 ; 3552.33,849.21 ccw(c3552.33,884.28) P3.31@3577.13,859.48 ; 3552.33,849.21 cw(c3552.33,814.14) P3.31@3577.13,838.94 ; 3552.33,849.21 ccw(c3552.33,884.28) P3.31@3577.13,859.48 ; 3552.33,849.21 ccw(c3552.33,884.28) P3.31@3577.13,859.48 ; 3552.33,849.21 cw(c3552.33,814.14) P3.31@3577.13,838.94
ADC2_CLK_P: P3.32 U2.127 | length 1866
  Top Layer w10: U2.127@2900.44,1243.04 3318.48,825 3490,825 3515,800 3625,800 ; P3.32@3687.4,849.21 3674.21,849.21 3625,800 ; 3625,800 cw(c3684.67,740.33) P3.32@3686.79,824.69 ; 3625,800 cw(c3684.67,740.33) P3.32@3686.79,824.69 ; 3625,800 cw(c3684.67,740.33) P3.32@3686.79,824.69 ; 3641.49,816.49 cw(c3685.48,772.49) P3.32@3687.04,834.69 ; 3641.49,816.49 cw(c3685.48,772.49) P3.32@3687.04,834.69 ; 3641.49,816.49 cw(c3685.48,772.49) P3.32@3687.04,834.69 ; 3654.86,829.86 ccw(c3635.5,849.21) P3.32@3662.87,849.21 ; 3654.86,829.86 ccw(c3635.5,849.21) P3.32@3662.87,849.21 ; 3654.86,829.86 ccw(c3635.5,849.21) P3.32@3662.87,849.21 ; 3657.6,817.65 ccw(c3645.66,867.12) P3.32@3692.43,847.05 ; 3657.6,817.65 ccw(c3645.66,867.12) P3.32@3692.43,847.05 ; 3657.6,817.65 ccw(c3645.66,867.12) P3.32@3692.43,847.05 ; 3657.97,832.97 cw(c3686.28,804.65) P3.32@3687.29,844.69 ; 3657.97,832.97 cw(c3686.28,804.65) P3.32@3687.29,844.69 ; 3657.97,832.97 cw(c3686.28,804.65) P3.32@3687.29,844.69 ; 3658.5,832.88 cw(c3686.92,825.26) P3.32@3687.51,854.68 ; 3658.5,832.88 cw(c3686.92,825.26) P3.32@3687.51,854.68 ; 3658.5,832.88 cw(c3686.92,825.26) P3.32@3687.51,854.68 ; 3661.05,828.42 ccw(c3654.06,857.39) P3.32@3683,850.29 ; 3661.05,828.42 ccw(c3654.06,857.39) P3.32@3683,850.29 ; 3661.05,828.42 ccw(c3654.06,857.39) P3.32@3683,850.29
ADC2_D0: P3.19 U2.10 | length 1410.7
  Top Layer w10: U2.10@3012.02,1705.38 3052.63,1746 3234,1746 3425,1555 3431.15,1555 3450.02,1573.87 3458.51,1573.87 3464.16,1568.21 3464.16,1559.73 3442.22,1537.78 3411.11,1506.67 3411.11,1498.18 3416.76,1492.53 3425.25,1492.53 3478.3,1545.58 3486.79,1545.58 3492.45,1539.93 3492.45,1531.44 3474.75,1513.74 3474.75,1505.25 3480.4,1499.6 3488.89,1499.6 3506.59,1517.3 3515.07,1517.3 3520.73,1511.64 3520.73,1503.16 3503.03,1485.46 3503.03,1476.97 3530.79,1449.21 ; P3.19@3587.4,1449.21 3530.79,1449.21 ; 3530.79,1449.21 cw(c3530.79,1396.15) P3.19@3569.51,1432.44 ; 3530.79,1449.21 ccw(c3530.79,1502.28) P3.19@3569.51,1465.99 ; 3530.79,1449.21 cw(c3530.79,1396.15) P3.19@3569.51,1432.44 ; 3530.79,1449.21 ccw(c3530.79,1502.28) P3.19@3569.51,1465.99 ; 3530.79,1449.21 ccw(c3530.79,1502.28) P3.19@3569.51,1465.99 ; 3530.79,1449.21 cw(c3530.79,1396.15) P3.19@3569.51,1432.44 ; 3553.87,1449.21 cw(c3553.87,1417.78) P3.19@3576.8,1439.28 ; 3553.87,1449.21 ccw(c3553.87,1480.64) P3.19@3576.8,1459.15 ; 3553.87,1449.21 cw(c3553.87,1417.78) P3.19@3576.8,1439.28 ; 3553.87,1449.21 ccw(c3553.87,1480.64) P3.19@3576.8,1459.15 ; 3553.87,1449.21 ccw(c3553.87,1480.64) P3.19@3576.8,1459.15 ; 3553.87,1449.21 cw(c3553.87,1417.78) P3.19@3576.8,1439.28
ADC2_D1: P3.20 U2.8 | length 1725.2
  Top Layer w10: U2.8@3039.85,1677.55 3092.31,1730 3205,1730 3285.33,1649.67 3285.33,1559.67 3302.12,1542.88 3310.6,1542.88 3337.47,1569.75 3345.96,1569.75 3351.62,1564.1 3351.62,1555.61 3324.75,1528.74 3324.75,1520.25 3330.4,1514.6 3338.89,1514.6 3365.76,1541.47 3374.24,1541.47 3379.9,1535.81 3379.9,1527.33 3353.03,1500.46 3353.03,1491.97 3375,1470 3465,1470 3526.32,1408.68 3646.87,1408.68 P3.20@3687.4,1449.21 ; 3646.88,1408.69 cw(c3685.55,1370.01) P3.20@3686.83,1424.69 ; 3646.88,1408.69 ccw(c3608.2,1447.36) P3.20@3662.88,1448.64 ; 3646.88,1408.69 cw(c3685.55,1370.01) P3.20@3686.83,1424.69 ; 3646.88,1408.69 ccw(c3608.2,1447.36) P3.20@3662.88,1448.64 ; 3646.88,1408.69 ccw(c3608.2,1447.36) P3.20@3662.88,1448.64 ; 3646.88,1408.69 cw(c3685.55,1370.01) P3.20@3686.83,1424.69 ; 3657.2,1425.25 cw(c3696.05,1415.8) P3.20@3686.03,1454.51 ; 3657.2,1425.25 cw(c3696.05,1415.8) P3.20@3686.03,1454.51 ; 3657.2,1425.25 cw(c3696.05,1415.8) P3.20@3686.03,1454.51 ; 3663.4,1425.21 cw(c3686.31,1402.3) P3.20@3687.06,1434.69 ; 3663.4,1425.21 ccw(c3640.49,1448.12) P3.20@3672.88,1448.87 ; 3663.4,1425.21 cw(c3686.31,1402.3) P3.20@3687.06,1434.69 ; 3663.4,1425.21 ccw(c3640.49,1448.12) P3.20@3672.88,1448.87 ; 3663.4,1425.21 ccw(c3640.49,1448.12) P3.20@3672.88,1448.87 ; 3663.4,1425.21 cw(c3686.31,1402.3) P3.20@3687.06,1434.69 ; 3663.44,1419.01 ccw(c3653.99,1457.86) P3.20@3692.7,1447.84 ; 3663.44,1419.01 ccw(c3653.99,1457.86) P3.20@3692.7,1447.84 ; 3663.44,1419.01 ccw(c3653.99,1457.86) P3.20@3692.7,1447.84
ADC2_D2: P3.21 U2.7 | length 1127.1
  Top Layer w10: U2.7@3053.77,1663.63 3100.15,1710 3190,1710 3265,1635 3265,1545 3387.98,1422.02 3396.46,1422.02 3423.33,1448.89 3431.82,1448.89 3437.47,1443.24 3437.47,1434.75 3410.6,1407.88 3410.6,1399.4 3416.26,1393.74 3424.75,1393.74 3451.62,1420.61 3460.1,1420.61 3465.76,1414.95 3465.76,1406.47 3438.89,1379.6 3438.89,1371.11 3470,1340 3485.58,1340 3491.58,1346 3491.58,1384 3497.58,1390 3505.58,1390 3511.58,1384 3511.58,1346 3517.58,1340 3541.58,1340 3550.79,1349.21 ; P3.21@3587.4,1349.21 3550.79,1349.21 ; 3550.79,1349.21 cw(c3550.79,1334.15) P3.21@3564.72,1339.88 ; 3550.79,1349.21 ccw(c3550.79,1364.27) P3.21@3564.72,1358.54 ; 3550.79,1349.21 cw(c3550.79,1334.15) P3.21@3564.72,1339.88 ; 3550.79,1349.21 ccw(c3550.79,1364.27) P3.21@3564.72,1358.54 ; 3550.79,1349.21 ccw(c3550.79,1364.27) P3.21@3564.72,1358.54 ; 3550.79,1349.21 cw(c3550.79,1334.15) P3.21@3564.72,1339.88
ADC2_D3: P3.22 U2.6 | length 1586.5
  Top Layer w10: U2.6@3067.69,1649.71 3107.98,1690 3180,1690 3235,1635 3235,1525 3455,1305 3502.05,1305 3512.05,1295 3633.19,1295 P3.22@3687.4,1349.21 ; 3645.53,1307.34 cw(c3687.4,1265.47) P3.22@3687.4,1324.68 ; 3645.53,1307.34 ccw(c3603.66,1349.21) P3.22@3662.87,1349.21 ; 3645.53,1307.34 cw(c3687.4,1265.47) P3.22@3687.4,1324.68 ; 3645.53,1307.34 ccw(c3603.66,1349.21) P3.22@3662.87,1349.21 ; 3645.53,1307.34 ccw(c3603.66,1349.21) P3.22@3662.87,1349.21 ; 3645.53,1307.34 cw(c3687.4,1265.47) P3.22@3687.4,1324.68 ; 3656.89,1326.86 cw(c3694.02,1316.92) P3.22@3686.3,1354.57 ; 3656.89,1326.86 cw(c3694.02,1316.92) P3.22@3686.3,1354.57 ; 3656.89,1326.86 cw(c3694.02,1316.92) P3.22@3686.3,1354.57 ; 3662.6,1324.41 cw(c3687.4,1299.61) P3.22@3687.4,1334.68 ; 3662.6,1324.41 ccw(c3637.8,1349.21) P3.22@3672.87,1349.21 ; 3662.6,1324.41 cw(c3687.4,1299.61) P3.22@3687.4,1334.68 ; 3662.6,1324.41 ccw(c3637.8,1349.21) P3.22@3672.87,1349.21 ; 3662.6,1324.41 ccw(c3637.8,1349.21) P3.22@3672.87,1349.21 ; 3662.6,1324.41 cw(c3687.4,1299.61) P3.22@3687.4,1334.68 ; 3665.05,1318.7 ccw(c3655.11,1355.83) P3.22@3692.76,1348.11 ; 3665.05,1318.7 ccw(c3655.11,1355.83) P3.22@3692.76,1348.11 ; 3665.05,1318.7 ccw(c3655.11,1355.83) P3.22@3692.76,1348.11
ADC2_D4: P3.23 U2.5 | length 1380.1
  Top Layer w10: U2.5@3081.61,1635.79 3115.82,1670 3155,1670 3210,1615 3210,1510 3327.98,1392.02 3327.98,1383.54 3310.27,1365.84 3310.27,1357.35 3315.93,1351.7 3324.42,1351.7 3342.12,1369.4 3350.6,1369.4 3356.26,1363.74 3356.26,1355.25 3338.56,1337.55 3338.56,1329.07 3344.22,1323.41 3352.7,1323.41 3370.4,1341.11 3378.89,1341.11 3384.54,1335.46 3384.54,1326.97 3366.84,1309.27 3366.84,1300.78 3372.5,1295.13 3380.98,1295.13 3398.69,1312.83 3407.17,1312.83 3435,1285 3475,1285 3510.79,1249.21 P3.23@3587.4,1249.21 ; 3528.19,1249.21 cw(c3528.19,1190) P3.23@3570.06,1231.87 ; 3528.19,1249.21 ccw(c3528.19,1308.43) P3.23@3570.06,1266.56 ; 3528.19,1249.21 cw(c3528.19,1190) P3.23@3570.06,1231.87 ; 3528.19,1249.21 ccw(c3528.19,1308.43) P3.23@3570.06,1266.56 ; 3528.19,1249.21 ccw(c3528.19,1308.43) P3.23@3570.06,1266.56 ; 3528.19,1249.21 cw(c3528.19,1190) P3.23@3570.06,1231.87 ; 3552.33,1249.21 cw(c3552.33,1214.14) P3.23@3577.13,1238.94 ; 3552.33,1249.21 ccw(c3552.33,1284.28) P3.23@3577.13,1259.48 ; 3552.33,1249.21 cw(c3552.33,1214.14) P3.23@3577.13,1238.94 ; 3552.33,1249.21 ccw(c3552.33,1284.28) P3.23@3577.13,1259.48 ; 3552.33,1249.21 ccw(c3552.33,1284.28) P3.23@3577.13,1259.48 ; 3552.33,1249.21 cw(c3552.33,1214.14) P3.23@3577.13,1238.94
ADC2_D5: P3.24 U2.4 | length 1819.9
  Top Layer w7.87: U2.4@3095.53,1621.87 3123.66,1650 ; 3190,1490 3190,1605
  Top Layer w10: 3123.66,1650 3145,1650 3190,1605 ; 3190,1490 3257.5,1422.5 3272.5,1422.5 3290,1405 3290,1355 3321.26,1323.74 3321.26,1315.25 3297.56,1291.56 3297.56,1283.07 3303.22,1277.42 3311.71,1277.42 3335.4,1301.11 3343.89,1301.11 3349.54,1295.46 3349.54,1286.97 3325.85,1263.27 3325.85,1254.79 3331.5,1249.13 3339.99,1249.13 3363.69,1272.83 3372.17,1272.83 3380,1265 3430,1265 3440,1255 3470,1255 3520,1205 3643.19,1205 P3.24@3687.4,1249.21 ; U2.4@3117.05,1642.11 cw(c3136.11,1623.05) 3136.11,1650 ; U2.4@3117.05,1642.11 cw(c3136.11,1623.05) 3136.11,1650 ; U2.4@3117.05,1642.11 cw(c3136.11,1623.05) 3136.11,1650 ; 3645.53,1207.34 cw(c3687.4,1165.47) P3.24@3687.4,1224.68 ; 3645.53,1207.34 ccw(c3603.66,1249.21) P3.24@3662.87,1249.21 ; 3645.53,1207.34 cw(c3687.4,1165.47) P3.24@3687.4,1224.68 ; 3645.53,1207.34 ccw(c3603.66,1249.21) P3.24@3662.87,1249.21 ; 3645.53,1207.34 ccw(c3603.66,1249.21) P3.24@3662.87,1249.21 ; 3645.53,1207.34 cw(c3687.4,1165.47) P3.24@3687.4,1224.68 ; 3656.89,1226.86 cw(c3694.02,1216.92) P3.24@3686.3,1254.57 ; 3656.89,1226.86 cw(c3694.02,1216.92) P3.24@3686.3,1254.57 ; 3656.89,1226.86 cw(c3694.02,1216.92) P3.24@3686.3,1254.57 ; 3662.6,1224.41 cw(c3687.4,1199.61) P3.24@3687.4,1234.68 ; 3662.6,1224.41 ccw(c3637.8,1249.21) P3.24@3672.87,1249.21 ; 3662.6,1224.41 cw(c3687.4,1199.61) P3.24@3687.4,1234.68 ; 3662.6,1224.41 ccw(c3637.8,1249.21) P3.24@3672.87,1249.21 ; 3662.6,1224.41 ccw(c3637.8,1249.21) P3.24@3672.87,1249.21 ; 3662.6,1224.41 cw(c3687.4,1199.61) P3.24@3687.4,1234.68 ; 3665.05,1218.7 ccw(c3655.11,1255.83) P3.24@3692.76,1248.11 ; 3665.05,1218.7 ccw(c3655.11,1255.83) P3.24@3692.76,1248.11 ; 3665.05,1218.7 ccw(c3655.11,1255.83) P3.24@3692.76,1248.11
ADC2_D6: P3.25 U2.137 | length 2860.7
  Top Layer w10: U2.137@3039.85,1382.45 3237.24,1185.06 3350,1185.06 3355,1190.06 3355,1224.7 3361,1230.7 3369,1230.7 3375,1224.7 3375,1191.06 3386.06,1180 3395,1180 3405,1190 3405,1229.06 3411,1235.06 3419,1235.06 3425,1229.06 3425,1141.06 3431,1135.06 3439,1135.06 3445,1141.06 3445,1218.88 3451,1224.88 3459,1224.88 3465,1218.88 3465,1141.06 3471,1135.06 3479,1135.06 3485,1141.06 3485,1165 3499.06,1179.06 3557.55,1179.06 ; 3560.44,1168.76 ccw(c3593.59,1177.29) P3.25@3586.23,1143.87 ; 3560.43,1168.79 ccw(c3593.61,1177.32) P3.25@3586.22,1143.87 ; 3560.65,1168.16 ccw(c3593.05,1176.66) P3.25@3586.3,1143.85 ; 3567.85,1176.17 cw(c3559.32,1143.03) 3592.75,1150.39 ccw(c3559.3,1143) 3567.83,1176.18 ; 3568.46,1175.96 cw(c3559.96,1143.56) P3.25@3592.76,1150.32 ; P3.25@3580.93,1172.87 cw(c3574.57,1196.11) 3557.55,1179.06 ; P3.25@3587.4,1149.21 3557.55,1179.06 ; 3557.55,1179.07 cw(c3540.09,1161.93) P3.25@3563.72,1155.58 ; 3557.55,1179.07 ccw(c3574.46,1195.66) P3.25@3580.82,1172.84 ; 3557.55,1179.06 cw(c3540.51,1162.04) P3.25@3563.74,1155.68 ; 3557.55,1179.06 ccw(c3574.56,1196.06) P3.25@3580.92,1172.87 ; 3557.55,1179.06 cw(c3540.54,1162.05) P3.25@3563.75,1155.69 ; 3557.55,1179.06 ccw(c3574.57,1196.08) P3.25@3580.92,1172.87 ; 3557.55,1179.07 cw(c3540.09,1161.93) P3.25@3563.72,1155.58 ; 3557.55,1179.07 ccw(c3574.46,1195.66) P3.25@3580.82,1172.84 ; 3557.55,1179.07 cw(c3540.95,1162.16) P3.25@3563.77,1155.8 ; 3557.55,1179.07 ccw(c3574.69,1196.53) P3.25@3581.04,1172.9 ; 3557.55,1179.06 cw(c3540.55,1162.05) P3.25@3563.75,1155.69 ; 3557.55,1179.07 cw(c3540.95,1162.16) P3.25@3563.77,1155.8 ; 3557.55,1179.07 ccw(c3574.69,1196.53) P3.25@3581.04,1172.9 ; 3557.55,1179.06 cw(c3540.54,1162.05) P3.25@3563.75,1155.69 ; 3557.55,1179.06 ccw(c3574.57,1196.08) P3.25@3580.92,1172.87 ; 3557.55,1179.07 cw(c3540.09,1161.93) P3.25@3563.72,1155.58 ; 3557.55,1179.07 ccw(c3574.46,1195.66) P3.25@3580.82,1172.84 ; 3557.55,1179.07 cw(c3540.95,1162.16) P3.25@3563.77,1155.8 ; 3557.55,1179.07 ccw(c3574.69,1196.53) P3.25@3581.04,1172.9 ; 3557.55,1179.06 ccw(c3574.57,1196.08) P3.25@3580.92,1172.87 ; 3557.55,1179.06 cw(c3540.54,1162.05) P3.25@3563.75,1155.69 ; 3557.87,1178.74 cw(c3540.97,1162.16) P3.25@3563.78,1155.8 ; 3557.87,1178.74 ccw(c3574.23,1194.8) P3.25@3580.59,1172.78 ; 3557.84,1178.77 cw(c3540.18,1161.96) P3.25@3563.72,1155.6 ; 3557.84,1178.77 ccw(c3574.08,1194.24) 3580.44,1172.73 cw(c3574.08,1194.25) 3557.83,1178.78 ; 3557.87,1178.75 cw(c3541.41,1162.28) P3.25@3563.81,1155.92 ; 3557.87,1178.75 ccw(c3574.35,1195.22) P3.25@3580.71,1172.81 ; 3557.87,1178.74 cw(c3540.97,1162.16) P3.25@3563.78,1155.8 ; 3557.87,1178.74 ccw(c3574.23,1194.8) P3.25@3580.59,1172.78 ; 3557.87,1178.75 cw(c3541.81,1162.39) P3.25@3563.84,1156.02 ; 3557.87,1178.75 ccw(c3574.46,1195.64) P3.25@3580.81,1172.84 ; 3557.87,1178.74 cw(c3541.4,1162.27) P3.25@3563.81,1155.91 ; 3557.87,1178.74 ccw(c3574.33,1195.21) P3.25@3580.7,1172.81 ; 3557.87,1178.74 cw(c3541.41,1162.27) P3.25@3563.81,1155.91 ; 3557.87,1178.74 ccw(c3574.33,1195.19) P3.25@3580.7,1172.8 ; 3557.87,1178.75 cw(c3541.81,1162.39) P3.25@3563.84,1156.02 ; 3557.87,1178.75 ccw(c3574.46,1195.64) P3.25@3580.81,1172.84 ; 3557.87,1178.74 cw(c3540.97,1162.16) P3.25@3563.78,1155.8 ; 3557.87,1178.74 ccw(c3574.23,1194.8) P3.25@3580.59,1172.78 ; 3557.87,1178.75 cw(c3541.81,1162.39) P3.25@3563.84,1156.02 ; 3557.87,1178.75 ccw(c3574.46,1195.64) P3.25@3580.81,1172.84 ; 3557.83,1178.78 cw(c3540.17,1161.95) P3.25@3563.72,1155.6 ; 3557.84,1178.78 cw(c3542.36,1162.53) 3563.88,1156.17 ccw(c3542.37,1162.53) 3557.84,1178.78 ; 3557.84,1178.78 ccw(c3574.66,1196.44) 3581.01,1172.89 cw(c3574.66,1196.43) 3557.84,1178.78 ; 3557.88,1178.74 cw(c3541.39,1162.27) P3.25@3563.81,1155.91 ; 3557.88,1178.74 ccw(c3574.33,1195.18) P3.25@3580.69,1172.8 ; 3557.88,1178.74 cw(c3541.42,1162.28) P3.25@3563.81,1155.92 ; 3557.88,1178.74 ccw(c3574.34,1195.21) P3.25@3580.7,1172.81 ; 3557.88,1178.74 cw(c3541.43,1162.28) P3.25@3563.81,1155.92 ; 3557.88,1178.74 ccw(c3574.34,1195.22) P3.25@3580.7,1172.81 ; 3560.33,1169.07 ccw(c3593.87,1177.62) P3.25@3586.19,1143.88 ; 3560.33,1169.07 ccw(c3593.87,1177.62) P3.25@3586.19,1143.88 ; 3560.33,1169.07 ccw(c3593.87,1177.62) P3.25@3586.19,1143.88 ; 3567.54,1176.28 cw(c3558.99,1142.74) P3.25@3592.74,1150.43 ; 3567.54,1176.28 cw(c3558.99,1142.74) P3.25@3592.74,1150.43 ; 3567.54,1176.28 cw(c3558.99,1142.74) P3.25@3592.74,1150.43
ADC2_D7: P3.26 U2.135 | length 1745.8
  Top Layer w10: U2.135@3012.02,1354.62 3266.63,1100 3294,1100 3300,1106 3300,1144 3306,1150 3314,1150 3320,1144 3320,1071.21 3326,1065.21 3334,1065.21 3340,1071.21 3340,1144 3346,1150 3354,1150 3360,1144 3360,1100 3638.19,1100 P3.26@3687.4,1149.21 ; 3645.53,1107.34 cw(c3687.4,1065.47) P3.26@3687.4,1124.68 ; 3645.53,1107.34 ccw(c3603.66,1149.21) P3.26@3662.87,1149.21 ; 3645.53,1107.34 cw(c3687.4,1065.47) P3.26@3687.4,1124.68 ; 3645.53,1107.34 ccw(c3603.66,1149.21) P3.26@3662.87,1149.21 ; 3645.53,1107.34 ccw(c3603.66,1149.21) P3.26@3662.87,1149.21 ; 3645.53,1107.34 cw(c3687.4,1065.47) P3.26@3687.4,1124.68 ; 3656.89,1126.86 cw(c3694.02,1116.92) P3.26@3686.3,1154.57 ; 3656.89,1126.86 cw(c3694.02,1116.92) P3.26@3686.3,1154.57 ; 3656.89,1126.86 cw(c3694.02,1116.92) P3.26@3686.3,1154.57 ; 3662.6,1124.41 cw(c3687.4,1099.61) P3.26@3687.4,1134.68 ; 3662.6,1124.41 ccw(c3637.8,1149.21) P3.26@3672.87,1149.21 ; 3662.6,1124.41 cw(c3687.4,1099.61) P3.26@3687.4,1134.68 ; 3662.6,1124.41 ccw(c3637.8,1149.21) P3.26@3672.87,1149.21 ; 3662.6,1124.41 ccw(c3637.8,1149.21) P3.26@3672.87,1149.21 ; 3662.6,1124.41 cw(c3687.4,1099.61) P3.26@3687.4,1134.68 ; 3665.05,1118.7 ccw(c3655.11,1155.83) P3.26@3692.76,1148.11 ; 3665.05,1118.7 ccw(c3655.11,1155.83) P3.26@3692.76,1148.11 ; 3665.05,1118.7 ccw(c3655.11,1155.83) P3.26@3692.76,1148.11
ADC2_D8: P3.27 U2.132 | length 1460.5
  Top Layer w10: U2.132@2970.26,1312.86 3060.94,1222.17 3069.43,1222.17 3091.39,1244.13 3099.87,1244.13 3105.53,1238.48 3105.53,1229.99 3083.57,1208.03 3083.57,1199.54 3089.22,1193.89 3097.71,1193.89 3119.67,1215.85 3128.16,1215.85 3133.81,1210.19 3133.81,1201.71 3111.85,1179.75 3111.85,1171.26 3117.51,1165.6 3125.99,1165.6 3147.96,1187.57 3156.44,1187.57 3162.1,1181.91 3162.1,1173.42 3140.14,1151.46 3140.14,1142.98 3145.79,1137.32 3154.28,1137.32 3176.24,1159.28 3184.73,1159.28 3190.38,1153.62 3190.38,1145.14 3166.56,1121.31 3166.56,1116.56 3233.9,1049.21 P3.27@3587.4,1049.21 ; 3528.19,1049.21 cw(c3528.19,990) P3.27@3570.06,1031.87 ; 3528.19,1049.21 ccw(c3528.19,1108.43) P3.27@3570.06,1066.56 ; 3528.19,1049.21 cw(c3528.19,990) P3.27@3570.06,1031.87 ; 3528.19,1049.21 ccw(c3528.19,1108.43) P3.27@3570.06,1066.56 ; 3528.19,1049.21 ccw(c3528.19,1108.43) P3.27@3570.06,1066.56 ; 3528.19,1049.21 cw(c3528.19,990) P3.27@3570.06,1031.87 ; 3552.33,1049.21 cw(c3552.33,1014.14) P3.27@3577.13,1038.94 ; 3552.33,1049.21 ccw(c3552.33,1084.28) P3.27@3577.13,1059.48 ; 3552.33,1049.21 cw(c3552.33,1014.14) P3.27@3577.13,1038.94 ; 3552.33,1049.21 ccw(c3552.33,1084.28) P3.27@3577.13,1059.48 ; 3552.33,1049.21 ccw(c3552.33,1084.28) P3.27@3577.13,1059.48 ; 3552.33,1049.21 cw(c3552.33,1014.14) P3.27@3577.13,1038.94
ADC2_D9: P3.28 U2.131 | length 1772.6
  Top Layer w10: U2.131@2956.34,1298.94 3246.59,1008.68 3349,1008.68 3355,1002.68 3355,972.24 3361,966.24 3369,966.24 3375,972.24 3375,1026.19 3381,1032.19 3389,1032.19 3395,1026.19 3395,972.24 3401,966.24 3409,966.24 3415,972.24 3415,995 3440,1020 3530,1020 3555,995 3633.19,995 P3.28@3687.4,1049.21 ; 3645.53,1007.34 cw(c3687.4,965.47) P3.28@3687.4,1024.68 ; 3645.53,1007.34 ccw(c3603.66,1049.21) P3.28@3662.87,1049.21 ; 3645.53,1007.34 cw(c3687.4,965.47) P3.28@3687.4,1024.68 ; 3645.53,1007.34 ccw(c3603.66,1049.21) P3.28@3662.87,1049.21 ; 3645.53,1007.34 ccw(c3603.66,1049.21) P3.28@3662.87,1049.21 ; 3645.53,1007.34 cw(c3687.4,965.47) P3.28@3687.4,1024.68 ; 3656.89,1026.86 cw(c3694.02,1016.92) P3.28@3686.3,1054.57 ; 3656.89,1026.86 cw(c3694.02,1016.92) P3.28@3686.3,1054.57 ; 3656.89,1026.86 cw(c3694.02,1016.92) P3.28@3686.3,1054.57 ; 3662.6,1024.41 cw(c3687.4,999.61) P3.28@3687.4,1034.68 ; 3662.6,1024.41 ccw(c3637.8,1049.21) P3.28@3672.87,1049.21 ; 3662.6,1024.41 cw(c3687.4,999.61) P3.28@3687.4,1034.68 ; 3662.6,1024.41 ccw(c3637.8,1049.21) P3.28@3672.87,1049.21 ; 3662.6,1024.41 ccw(c3637.8,1049.21) P3.28@3672.87,1049.21 ; 3662.6,1024.41 cw(c3687.4,999.61) P3.28@3687.4,1034.68 ; 3665.05,1018.7 ccw(c3655.11,1055.83) P3.28@3692.76,1048.11 ; 3665.05,1018.7 ccw(c3655.11,1055.83) P3.28@3692.76,1048.11 ; 3665.05,1018.7 ccw(c3655.11,1055.83) P3.28@3692.76,1048.11
ADC2_D10: P3.29 U2.130 | length 1436.6
  Top Layer w10: U2.130@2942.42,1285.02 3278.22,949.21 3445,949.21 3445,986.69 3451,992.69 3459,992.69 3465,986.69 3465,930.68 3471,924.68 3479,924.68 3485,930.68 3485,986.69 3491,992.69 3499,992.69 3505,986.69 3505,930.68 3511,924.68 3519,924.68 3525,930.68 3525,943.21 3531,949.21 ; P3.29@3587.4,949.21 3531,949.21 ; 3531,949.21 cw(c3531,896.63) P3.29@3569.46,932.49 ; 3531,949.21 ccw(c3531,1001.79) P3.29@3569.46,965.94 ; 3531,949.21 cw(c3531,896.63) P3.29@3569.46,932.49 ; 3531,949.21 ccw(c3531,1001.79) P3.29@3569.46,965.94 ; 3531,949.21 ccw(c3531,1001.79) P3.29@3569.46,965.94 ; 3531,949.21 cw(c3531,896.63) P3.29@3569.46,932.49 ; 3554,949.21 cw(c3554,918.07) P3.29@3576.78,939.31 ; 3554,949.21 ccw(c3554,980.35) P3.29@3576.78,959.12 ; 3554,949.21 cw(c3554,918.07) P3.29@3576.78,939.31 ; 3554,949.21 ccw(c3554,980.35) P3.29@3576.78,959.12 ; 3554,949.21 ccw(c3554,980.35) P3.29@3576.78,959.12 ; 3554,949.21 cw(c3554,918.07) P3.29@3576.78,939.31